# Altium PCB Power.PcbDoc
Units mil, origin at the board's own origin, x right, y up, seen from the top; angles counter-clockwise.
Board outline 1220.47 x 1201.08 mil, 2 copper layers (Top Layer, Bottom Layer); 27 components, 23 nets, 99 pads, 59 vias.
Unrouted connection lines stored in the file: 54.
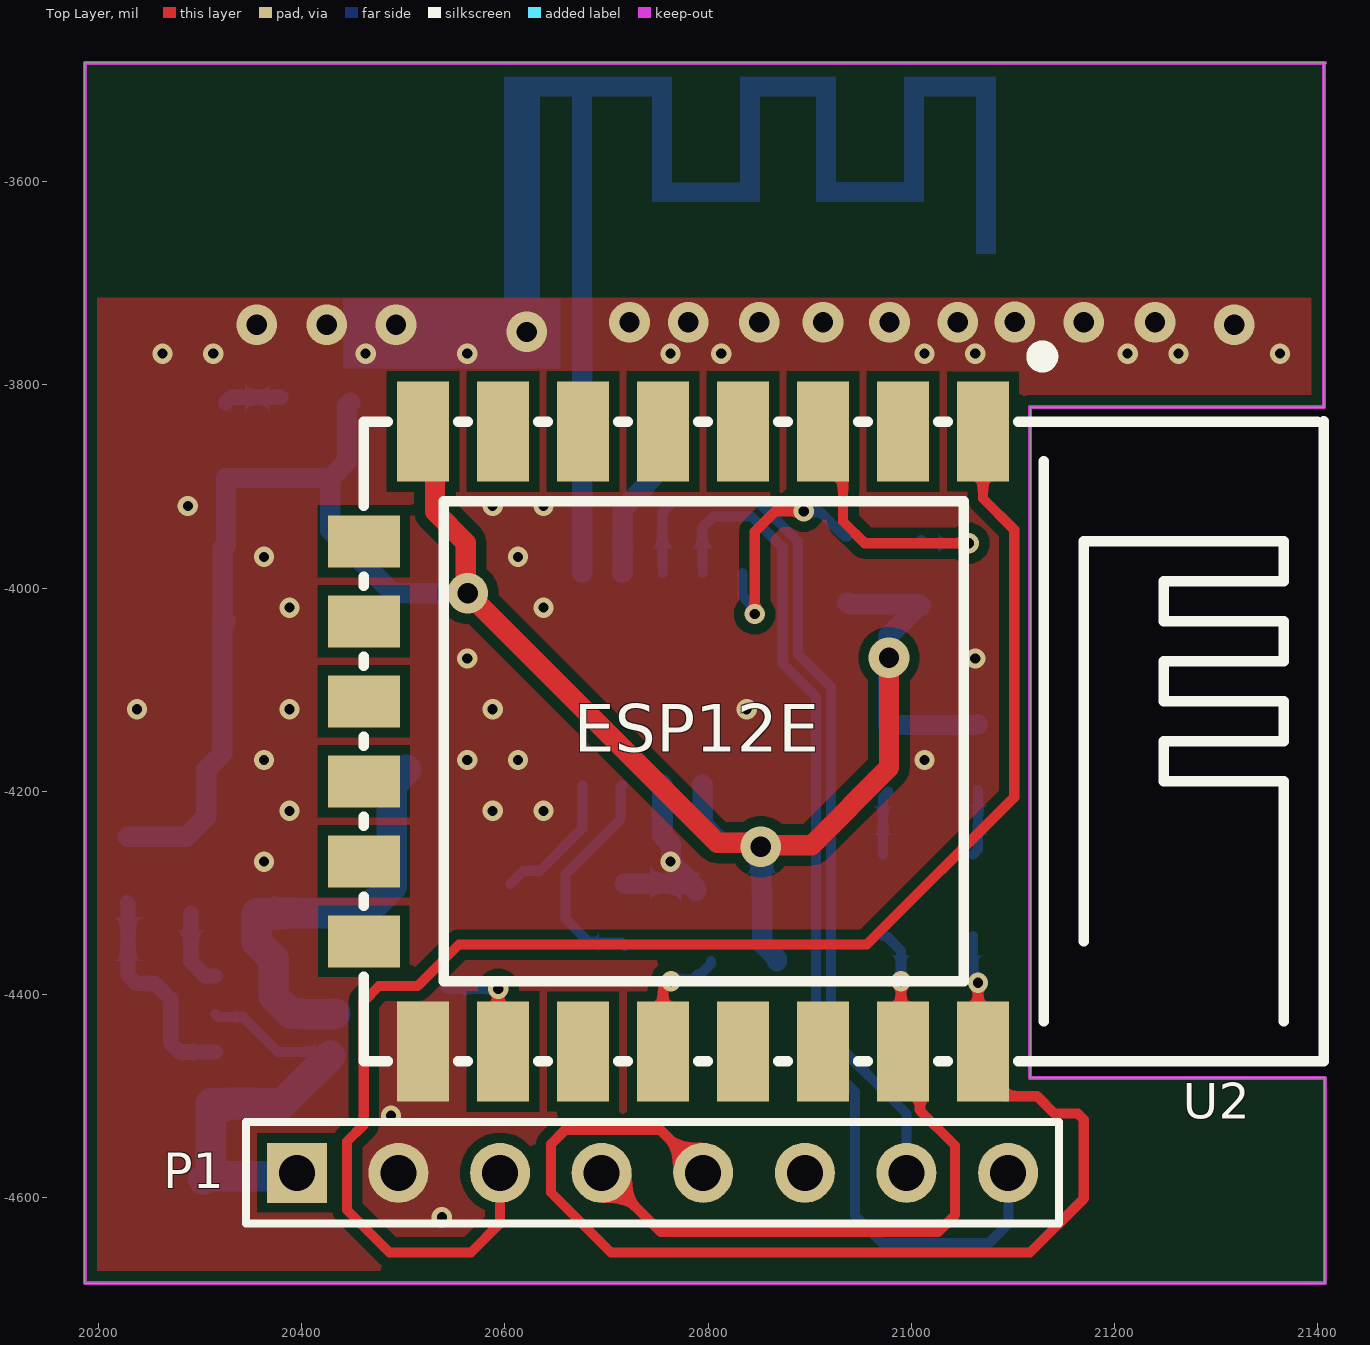
[diagram p0: Top Layer view]
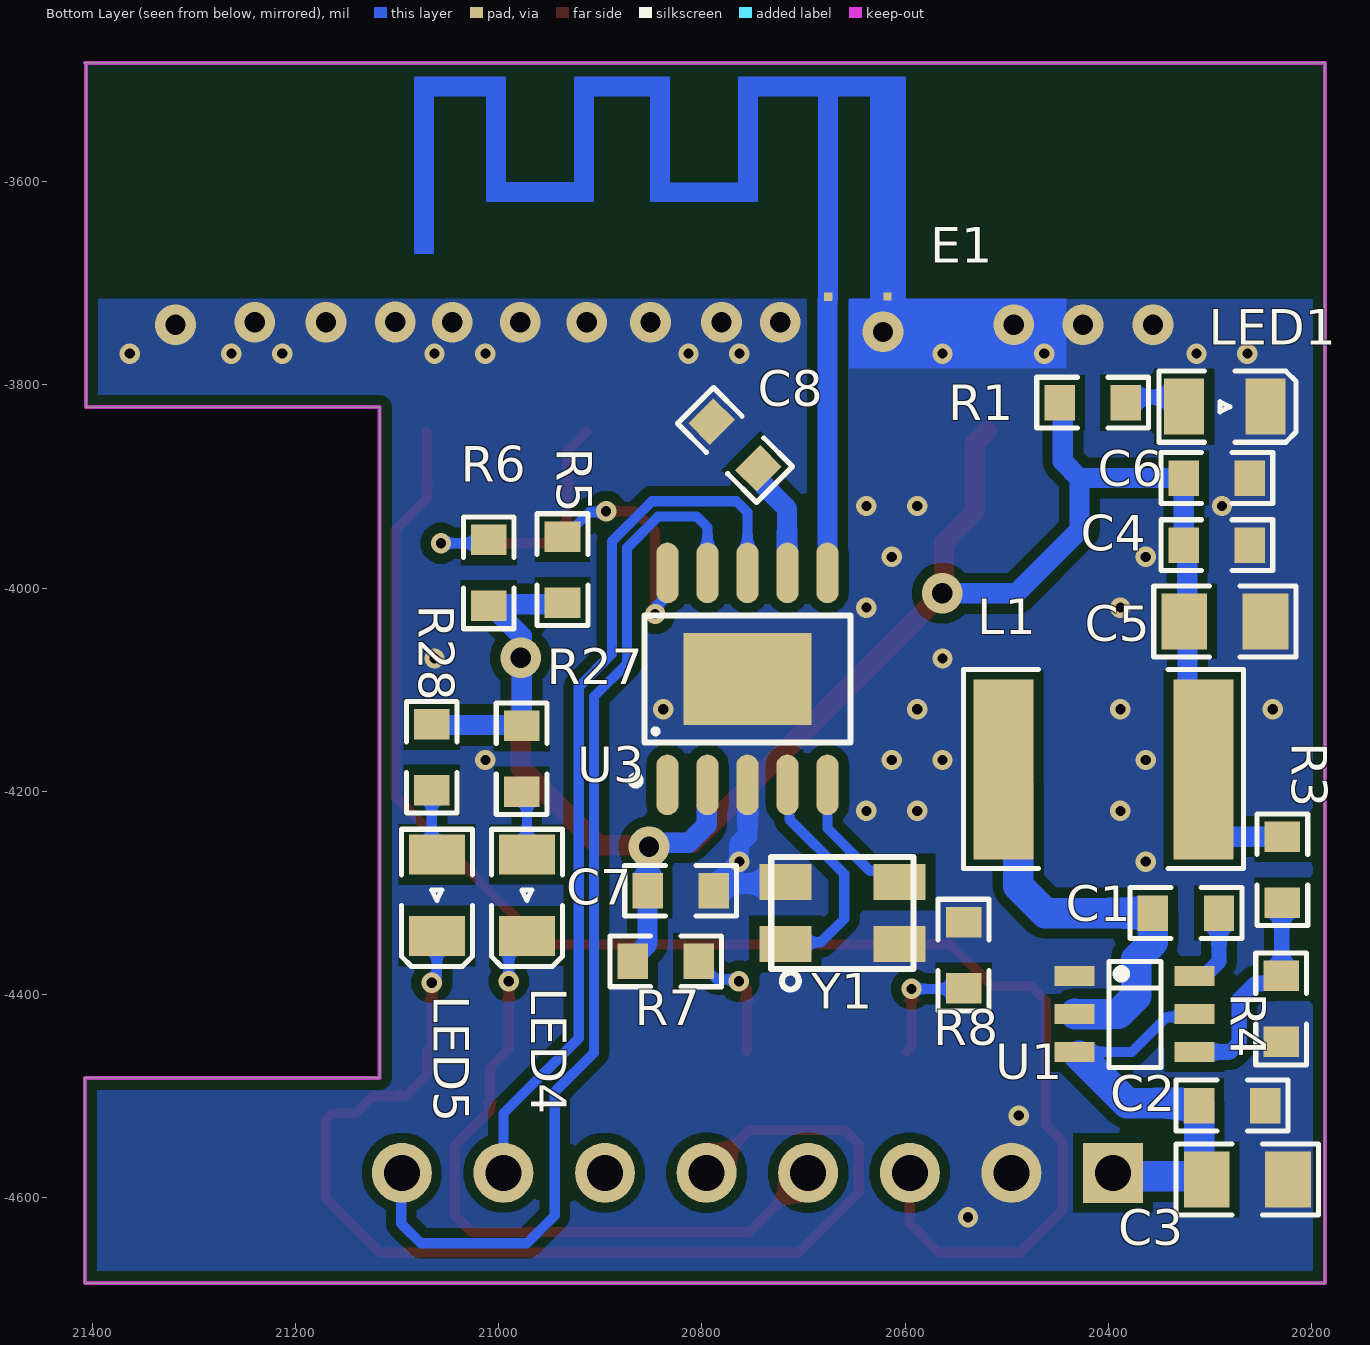
[diagram p1: Bottom Layer view, seen from below]

## Layer stack, top to bottom
Top Solder: solder mask 0.4, Solder Resist, Dk 3.5
Top Layer: signal copper 1.4
Dielectric 1: dielectric 12.6, FR-4, Dk 4.8
Bottom Layer: signal copper 1.4
Bottom Solder: solder mask 0.4, Solder Resist, Dk 3.5

## Board outline
20186.71,-4684.26 20186.71,-3483.25 20690.15,-3483.25 20690.15,-3483.18 21407.18,-3483.18 21406.09,-3484.27 21406.09,-3821.87 21117.04,-3821.87 21117.04,-4482.14 21407.18,-4482.14 21407.18,-4684.26

## Design rules (kind name [scope] priority, off if disabled: settings)
Clearance "via to pad" [Isvia vs IsPad] p1: gap=10 ignorepadtopadclearanceinfootprint=FALSE
Clearance poly [InPoly] p2: gap=10 ignorepadtopadclearanceinfootprint=FALSE
Clearance "track to track" [Istrack vs IsTrack] p3: gap=5 ignorepadtopadclearanceinfootprint=FALSE
Clearance "via to poly" [IsVia vs InPoly] p4: gap=10 ignorepadtopadclearanceinfootprint=FALSE
Clearance "via to track" [Isvia vs Istrack] p5: gap=10 ignorepadtopadclearanceinfootprint=FALSE
Clearance "via to via" [IsVia vs Isvia] p6: gap=10 ignorepadtopadclearanceinfootprint=FALSE
ComponentClearance [All] p1: gap=0 collisioncheckmode=3 verticalgap=10 showdistances=FALSE
DiffPairsRouting [All] p1: maxlimit=10 minlimit=7 mostfreqgap=7 toplayer_minwidth=5 toplayer_maxwidth=100 toplayer_prefwidth=7 bottomlayer_minwidth=5 bottomlayer_maxwidth=100 bottomlayer_prefwidth=7 maxuncoupledlength=500
HoleToHoleClearance [All] p1: gap=7 allowstackedmicrovias=TRUE
MinimumSolderMaskSliver [All] p1: minsoldermaskwidth=0
PolygonConnect AGND_1_Via [IsVia] p1: connectstyle=Direct reliefconductorwidth=10 reliefentries=4 polygonreliefangle="90 Angle" airgapwidth=10
PolygonConnect [All] p2: connectstyle=Direct reliefconductorwidth=10 reliefentries=4 polygonreliefangle="90 Angle" airgapwidth=10
PolygonConnect AC24V_Lout [All] p3: connectstyle=Relief reliefconductorwidth=10 reliefentries=4 polygonreliefangle="90 Angle" airgapwidth=10
PolygonConnect AGND_2 [InNet('AGND_2')] p4: connectstyle=Relief reliefconductorwidth=10 reliefentries=4 polygonreliefangle="90 Angle" airgapwidth=10
PolygonConnect AGND_1 [InNet('AGND_1') vs Isvia] p5: connectstyle=Direct reliefconductorwidth=10 reliefentries=4 polygonreliefangle="90 Angle" airgapwidth=10
RoutingVias RoutingVias_1 [InNet('AGND_1')] p1: holewidth=10 width=20 viastyle="Through Hole" minholewidth=10 minwidth=20 maxholewidth=100 maxwidth=100
RoutingVias [All] p2: holewidth=10 width=20 viastyle="Through Hole" minholewidth=10 minwidth=20 maxholewidth=100 maxwidth=100
SilkToSilkClearance [All] p1: silktosilkclearance=0
SilkToSolderMaskClearance [IsPad] p1: minsilkscreentomaskgap=0 clearancetoexposedcopper=TRUE
SolderMaskExpansion [All] p1: expansion=1 istentingtop=FALSE
Width [All] p1: maxlimit=300 minlimit=5 preferedwidth=7 minimp=50.000000 maximp=50.000000 favimp=50.000000
24 further rules are at their usual default settings.

## Components (designator, comment, footprint, x,y, rotation, side; value= is the part's Value field where it differs from the comment)
C1 "104/25V" 0603R 20355.97,-4319.92 r180 bottom
C2 "10uF/25V" 0603R 20245.61,-4509.45 r0 bottom
C3 "22uF/25V" 0805R 20303.11,-4582.32 r180 bottom
C4 "10uF/25V" 0603R 20260.53,-3957.83 r0 bottom
C5 "47uF/10V" 0805R 20325.18,-4032.83 r180 bottom
C6 "104/10V" 0603R 20260.53,-3891.77 r0 bottom
C7 "2.2uF" 0603R 20788.39,-4297.98 r0 bottom
C8 "2.2uF" 0603R 20790.34,-3836.29 r225 bottom
E1 "Antenna" ANT-F-1-2.4G-1.6MMFR4-WCH 20675.57,-3713.13 r180 bottom
L1 "4.7uH/3A" CD54 20503,-4178.79 r180 bottom
LED1 "LED" 0603LED 20325.18,-3821.56 r180 bottom
LED4 "LED" 0603LED 20972.19,-4262.42 r270 bottom
LED5 "LED" 0603LED 21060.78,-4262.42 r270 bottom
P1 "Header 8" HDR1X8 20395.29,-4575.6 r0 top locked
R1 "1K/5%/0603" 0603R 20447.83,-3817.55 r180 bottom
R3 "40.2K" 0603R 20228.63,-4244.79 r270 bottom
R4 "12K" 0603R 20229.82,-4381.8 r270 bottom
R5 "10K" 0603R 20937.14,-3949.4 r270 bottom
R6 "10K" 0603R 21009.7,-4017.59 r90 bottom
R7 "10K" 0603R 20802.94,-4367.42 r0 bottom
R8 "10K" 0603R 20542.37,-4393.8 r90 bottom
R27 "1K/5%/0603" 0603R 20977.35,-4135.61 r270 bottom
R28 "1K/5%/0603" 0603R 21065.78,-4134.08 r270 bottom
U1 "DIO6930" SOT-23-6DBV 20433.04,-4381.8 r270 bottom
U2 "ESP8266" ESP12E 20765.89,-4150.93 r180 top locked
U3 "CH9141K" CH9141K 20755.07,-4089.46 r180 bottom
Y1 "32MHZ/8PF" 3225 20661.7,-4319.92 r0 bottom

## Footprints (in the part's own frame and the unit in brackets; to place one, negate y for a bottom-side part, rotate by r counter-clockwise, add the part's x,y. Pads: shape width x height; smd on the part's side, far side on the other; paste and mask are expansions set on the pad)
0603LED [mm]
  rect 1x1.4 smd: 1(0,0) 2(2.032,0)
  silkscreen extent -0.64,-0.89 2.79,0.89
0603R [mil]
  rect 30x35 smd: 1(0,0) 2(65,0)
  silkscreen extent -23,-25 88,25
0805R [mil]
  rect 45x55 smd: 1(0,0) 2(80,0)
  silkscreen extent -30,-35 110,35
3225 [mm]
  rect 1.3x0.9 smd: 1(1.425,0.775) 2(-1.425,0.775) 3(-1.425,-0.775) 4(1.425,-0.775)
  silkscreen extent -1.78,-1.4 1.78,1.91, body extent -1.65,-1.3 1.55,1.2, height 0.61
ANT-F-1-2.4G-1.6MMFR4-WCH [mm]
  rect 0.2x0.2 smd mask+0: 0(1.483,0) 0(1.483,-0.004) 0(1.486,0.006) 1(-0.003,-0.01) 1(0,0) 1(0.003,0.006)
  Top Layer region: 0.24,-0.1 -0.26,-0.1 -0.26,5.231 0.24,5.231
  Top Layer region: 1.94,5 -2.26,5 -2.26,5.5 1.94,5.5
  Top Layer region: -1.76,2.361 -2.26,2.361 -2.26,5.181 -1.76,5.181
  Top Layer region: -1.85,2.36 -4.39,2.36 -4.39,2.855 -1.85,2.855
  Top Layer region: -3.96,2.36 -4.46,2.36 -4.46,5.18 -3.96,5.18
  Top Layer region: -3.96,5 -6.36,5 -6.36,5.5 -3.96,5.5
  Top Layer region: -5.86,2.361 -6.36,2.361 -6.36,5.181 -5.86,5.181
  Top Layer region: -5.875,2.361 -8.364,2.361 -8.364,2.861 -5.875,2.861
  Top Layer region: -8.06,2.361 -8.56,2.361 -8.56,5.181 -8.06,5.181
  Top Layer region: -8.06,5 -10.36,5 -10.36,5.5 -8.06,5.5
  Top Layer region: -9.86,1.06 -10.36,1.06 -10.36,5.18 -9.86,5.18
  Top Layer region: 1.94,-0.1 1.04,-0.1 1.04,5.206 1.94,5.206
CD54 [mm]
  rect 1.5x4.5 smd: 1(0,0) 2(5,0)
  silkscreen extent -1,-2.47 5.99,2.5
CH9141K [mm]
  oval 0.56x1.515 smd paste+0.051: 1(-2,-2.65) 2(-1,-2.65) 3(0,-2.65) 4(1,-2.65) 5(2,-2.65) 6(2,2.65) 7(1,2.65) 8(0,2.65) 9(-1,2.65) 10(-2,2.65)
  rect 3.2x2.3 smd paste+0.051: 11(0,0)
  silkscreen extent -2.89,-2.64 2.58,1.59
ESP12E [mm]
  rect 1.3x2.5 smd paste-100 mask+0.051: 1(-7.74,-7.75) 2(-5.74,-7.75) 3(-3.74,-7.75) 4(-1.74,-7.75) 5(0.26,-7.75) 6(2.26,-7.75) 7(4.26,-7.75) 8(6.26,-7.75) 15(6.26,7.75) 16(4.26,7.75) 17(2.26,7.75) 18(0.26,7.75) 19(-1.74,7.75) 20(-3.74,7.75) 21(-5.74,7.75) 22(-7.74,7.75)
  rect 1.8x1.3 smd paste-100 mask+0.051: 9(7.74,-5.001) 10(7.739,-3.001) 11(7.739,-1.001) 12(7.739,0.999) 13(7.739,2.999) 14(7.74,4.999)
  silkscreen extent -16.26,-9.82 7.74,8
HDR1X8 [mm] "Connector; Header; 8 Position"
  rect 1.5x1.5 hole 0.9: 1(0,0)
  round 1.5 hole 0.9: 2(2.54,0) 3(5.08,0) 4(7.62,0) 5(10.16,0) 6(12.7,0) 7(15.24,0) 8(17.78,0)
  silkscreen extent -1.27,-1.27 19.05,1.27
SOT-23-6DBV [mm]
  rect 0.5x1 smd: 1(0,0) 2(0.95,0) 3(1.9,0) 4(1.9,3) 5(0.95,3) 6(0,3)
  silkscreen extent -0.37,0.86 2.29,2.16

## Part data
C1 C6 C7 C8: library part CAP_1
C2 C4: library part CAP
C3 C5: library part "Cap Pol1", "Polarized Capacitor (Radial)", LatestRevisionDate=17-Jul-2002, LatestRevisionNote="Re-released for DXP Platform.", PackageDescription="Polarized Capacitor (Radial); 2 Leads", PackageReference=RB7.6-15, Published=8-Jun-2000, Publisher="Altium Limited"
E1: "Generic Antenna", LatestRevisionDate=17-Jul-2002, LatestRevisionNote="Re-released for DXP Platform.", PackageReference=PIN1, Published=24-Mar-1999, Publisher="Altium Limited"
L1: library part Inductor, "Inductor", Code_IEC=1005, Code_JEITA=0402, LatestRevisionDate=29-May-2009, LatestRevisionNote="IPC-7351 Footprint Added.", PackageDescription="Chip Inductor", PackageReference=0402-A, Published=8-Jun-2000, Publisher="Altium Limited"
P1: "Header, 8-Pin", LatestRevisionDate=17-Jul-2002, LatestRevisionNote="Re-released for DXP Platform.", Publisher="Altium Limited"
R1 R27 R28: library part RES
R3 R4 R5 R6 R7 R8: library part Res2, "Resistor", LatestRevisionDate=17-Jul-2002, LatestRevisionNote="Re-released for DXP Platform.", PackageDescription="Axial Device, Thru-Hole; 2 Leads; 0.4 in Pin Spacing", PackageReference=AXIAL-0.4, Published=8-Jun-2000, Publisher="Altium Limited"
U1: library part BL8032
U2: library part ESP-12E, Symbol=ESP-12E
Y1: library part 12MHz无源
U3: Symbol=CH9141K

## Via types
v1: diameter 20, hole 10, Top Layer to Bottom Layer, 42 vias
v2: diameter 40, hole 20, Top Layer to Bottom Layer, 17 vias

## Nets (pads, with @x,y where several pads share a name; then routed paths per layer and width w, separated by ;. In a path a pad name is that pad's centre, name@x,y a point inside that pad or via, vN(x,y) a via of type N, cw(c..) or ccw(c..) an arc to the next point about the centre after c; other vN are vias at no path point)
BLE_MCU_RXD: P1.8 U3.9 | length 1048.5
  Bottom Layer w10: U3.9 20794.44,-3940.3 20805.09,-3929.66 20842.82,-3929.66 20873.55,-3960.39 20873.55,-4074.24 20906.15,-4106.84 20906.15,-4457.35 20944.68,-4495.88 20944.68,-4617.68 20972,-4645 21076.38,-4645 21095.78,-4625.6 21095.78,-4576.08 P1.8
BLE_MCU_TXD: P1.7 U3.8 | length 879.6
  Bottom Layer w10: U3.8 20755.07,-3925.47 20765.89,-3914.66 20849.03,-3914.66 20888.55,-3954.18 20888.55,-4064.78 20921.15,-4097.37 20921.15,-4443.05 20995.29,-4517.2 P1.7
BLE_Reset: P1.6
GND: C2.1 C3.2 C4.1 C5.2 C6.1 C7.1 C8.1 LED1.2 P1.2 R4.2 R8.2 U1.1 U2.15 U3.3 U3.11 Y1.2 Y1.4 | length 190.6
  Bottom Layer w20: Y1.4@20717.89,-4291.01 20783.39,-4291.01 C7.1@20788.39,-4296.01 ; U3.3 20755.07,-4243.89 20763.48,-4252.29 20763.48,-4270.57 20788.39,-4295.48 C7.1@20788.39,-4296.01 ; C7.1 C7.1@20788.39,-4296.01
  other v1: 20538.03,-4619.32 20488.03,-4519.32 20363.03,-4269.32 20763.03,-4269.32 20388.03,-4219.32 20588.03,-4219.32 20638.03,-4219.32 20363.03,-4169.32 20563.03,-4169.32 20613.03,-4169.32 21013.03,-4169.32 20238.03,-4119.32 20388.03,-4119.32 20588.03,-4119.32 20838.03,-4119.32 20563.03,-4069.32 21063.03,-4069.32 20388.03,-4019.32 20638.03,-4019.32 20363.03,-3969.32 20613.03,-3969.32 20288.03,-3919.32 20588.03,-3919.32 20638.03,-3919.32 20263.03,-3769.32 20313.03,-3769.32 20463.03,-3769.32 20563.03,-3769.32 20763.03,-3769.32 20813.03,-3769.32 21013.03,-3769.32 21063.03,-3769.32 21213.03,-3769.32 21263.03,-3769.32 21363.03,-3769.32
  other v2: 20621.7,-3747.95 20355.97,-3741 20424.81,-3741 20492.86,-3741 21318,-3741 20722.72,-3738.39 20780.69,-3738.39 20850.44,-3738.39 20913.1,-3738.39 20978.63,-3738.39 21045.78,-3738.39 21101.83,-3738.18 21169.87,-3738.39 21240,-3738.39
NetC1_1: C1.1 L1.1 U1.2 | length 420.8
  Bottom Layer w30: U1.2 20432.63,-4419.62 20399.04,-4419.62 20398.63,-4419.21 20390.12,-4419.21 20372.54,-4401.63 20372.54,-4365.33 20355.97,-4348.75 C1.1 20461.92,-4319.92 20488.48,-4293.36 20488.48,-4193.32 L1.1
NetC1_2: C1.2 U1.6 | length 77.6
  Bottom Layer w15: C1.2 20290.97,-4367.68 20305.09,-4381.8 U1.6
NetC8_2: C8.2 U3.7 | length 116.2
  Bottom Layer w20: U3.7 20716.1,-3984.73 20716.1,-3921.98 20738.28,-3899.79 20738.28,-3898.96 20746.15,-3891.09 20746.15,-3884.02 C8.2
NetE1_1: E1.1 U3.6 | length 269
  Bottom Layer w20: E1.1@20676.21,-3716.19 20676.21,-3947.02 20676.33,-3947.14 U3.6
NetLED1_1: LED1.1 R1.2 | length 56.7
  Bottom Layer w15: LED1.1@20325.18,-3817.55 20330.52,-3812.21 R1.2@20379.69,-3812.21
NetLED4_1: LED4.1 R27.2 | length 64
  Bottom Layer w10: LED4.1 20972.19,-4205.77 R27.2
NetLED5_1: LED5.1 R28.2 | length 65.4
  Bottom Layer w10: LED5.1 21065.78,-4257.42 R28.2
NetR3_2: R3.2 R4.1 U1.4 | length 213.8
  Bottom Layer w15: R3.2 20229.23,-4310.39 20229.23,-4381.21 20237.32,-4389.3 20255.65,-4389.3 20271.09,-4404.75 20271.09,-4447.82 20279.88,-4456.61 U1.4
NetR5_1: R5.1 U3.10 | length 236.4
  Top Layer w10: v1(20845.94,-4025.62) 20845.94,-3944.6 20866.12,-3924.42 v1(20894.15,-3924.42)
  Bottom Layer w10: U3.10 20833.81,-4007.19 20844.03,-4017.4 20844.03,-4023.71 v1(20845.94,-4025.62) ; v1(20894.15,-3924.42) 20894.99,-3925.26 20910.49,-3925.26 20934.64,-3949.4 R5.1
NetR6_2: R6.2 U2.3 | length 277.9
  Top Layer w10: U2.3 20932.82,-3865.5 20932.82,-3934.56 20954.18,-3955.92 v1(21056.67,-3955.92)
  Bottom Layer w10: R6.2 21013.03,-3955.92 v1(21056.67,-3955.92)
NetR7_1: R7.1 U2.18 | length 121.2
  Top Layer w10: U2.18 20755.66,-4394.97 v1(20763.54,-4387.1)
  Bottom Layer w10: v1(20763.54,-4387.1) 20765.45,-4385.18 20785.19,-4385.18 20790.44,-4379.92 20792.94,-4379.92 20802.94,-4369.92 R7.1
NetR8_1: R8.1 U2.16 | length 114.9
  Top Layer w10: v1(20593.6,-4394.54) 20593.6,-4451.46 U2.16
  Bottom Layer w10: R8.1 20543.11,-4394.54 v1(20593.6,-4394.54)
VCC3.3: C4.2 C5.1 C6.2 C7.2 L1.2 R1.1 R3.1 R5.2 R6.1 R7.2 R27.1 R28.1 U2.8 U3.2 | length 2183.5
  Top Layer w20: U2.8 20531.33,-3857.71 20531.33,-3925.03 20561.56,-3955.27 20561.56,-4003.35 v2(20563.48,-4005.27) 20808.97,-4250.75 20848.2,-4250.75 v2(20852.03,-4254.58) 20853.47,-4253.13 20902.03,-4253.13 20978.11,-4177.05 v2(20978.11,-4068.59) v2@20977.35,-4067.83
  Bottom Layer w20: R3.1 20286.63,-4244.79 20306.15,-4225.26 L1.2 20322.02,-4162.93 C5.1@20322.02,-4032.83 ; C5.1 20322.35,-4030 20322.35,-3961 C4.2 C6.2 20428.27,-3891.77 ; R1.1 20444.65,-3820.73 20444.65,-3875.39 20428.27,-3891.77 ; v2(20563.48,-4005.27) 20490.35,-4005.27 20428.27,-3943.19 20428.27,-3891.77 ; U3.2 20794.84,-4194.18 20794.84,-4214.42 20795.11,-4214.7 20795.11,-4233.16 20812.7,-4250.75 20848.2,-4250.75 20852.71,-4255.26 20852.71,-4297.3 C7.2 20853.39,-4350.37 20867.94,-4364.92 R7.2 ; R5.2 20938.73,-4016 21008.1,-4016 R6.1 21007.2,-4017.59 20977.35,-4047.45 R27.1 20978.11,-4134.85 21065.01,-4134.85 R28.1
VCC12: C2.2 C3.1 P1.1 U1.3 U1.5 | length 436.2
  Bottom Layer w10: U1.5 20318.06,-4422.33 20342.55,-4422.33 20376.83,-4456.61 20424.81,-4456.61 U1.3@20428.36,-4460.15
  Bottom Layer w30: C3.1 C3.1@20306.47,-4578.96 ; P1.1 20391.93,-4578.96 C3.1@20306.47,-4578.96 ; U1.3@20428.36,-4460.15 20381.57,-4506.95 20310.61,-4506.95 20310.61,-4574.82 C3.1@20306.47,-4578.96
WIFI_MCU_RXD: LED5.2 P1.5 U2.22 | length 1128.1
  Top Layer w10: P1.5 20753.03,-4533.34 20659.45,-4533.34 20645.46,-4547.32 20645.46,-4595.02 20704.44,-4654 21116.89,-4654 21169.87,-4601.02 21169.87,-4523.06 21164.02,-4517.2 21140.9,-4517.2 21123.96,-4500.26 21091.21,-4500.26 21070.62,-4479.67 U2.22 21065.78,-4451.2 v1(21065.78,-4388.45)
  Bottom Layer w10: LED5.2 21060.78,-4383.45 v1(21065.78,-4388.45)
WIFI_MCU_TXD: LED4.2 P1.4 U2.21 | length 684.8
  Top Layer w10: P1.4 20753.7,-4634 21026.3,-4634 21043.02,-4617.28 21043.02,-4548.73 21008.69,-4514.4 21008.69,-4472.86 20989.96,-4454.12 v1(20989.96,-4387.1)
  Bottom Layer w10: LED4.2 20975.27,-4342.42 20989.96,-4357.11 v1(20989.96,-4387.1)
WIFI_Reset: P1.3 U2.1 | length 1538.1
  Top Layer w10: P1.3 20595.29,-4625.35 20566.64,-4654 20486.53,-4654 20444.65,-4612.12 20444.65,-4544.71 20461.21,-4528.15 20461.21,-4406.67 20476.21,-4391.67 20514.16,-4391.67 20554.89,-4350.93 20956.38,-4350.93 21101.38,-4205.93 21101.38,-3942.62 21070.61,-3911.85 U2.1
X32MI: U3.4 Y1.1 | length 224.1
  Bottom Layer w10: U3.4 20713.8,-4195.69 20713.8,-4227.48 20659.81,-4281.46 20659.81,-4325.76 20682.81,-4348.75 20714.61,-4348.75 Y1.1@20717.89,-4352.03
X32MO: U3.5 Y1.3 | length 136
  Bottom Layer w10: Y1.3@20605.68,-4291.01 20618.4,-4278.29 20634.6,-4278.29 20676.33,-4236.56 U3.5
pads on no net: E1.0 U2.2 U2.4 U2.5 U2.6 U2.7 U2.9 U2.10 U2.11 U2.12 U2.13 U2.14 U2.17 U2.19 U2.20 U3.1

## Polygon pours and split planes (outlines as drawn)
GND on Top Layer "NONET_L02_P-001" (solid, remove dead copper, pour order 3): 20163.35,-3705.28 20172.31,-3714.25 21542.16,-3714.25 21610.35,-3782.44 21610.35,-4758.28 21518.35,-4850.28 19832.35,-4850.28 19719.35,-4737.28 19839.35,-4617.28 19839.35,-4064.68 20164.35,-3739.68 20164.35,-3699.28
GND on Top Layer "NONET_L02_P-001" (solid, remove dead copper, pour order 1): 20136,-3720 21496.65,-3720 21609,-3832.35 21609,-4652 21488,-4773 21470,-4755 20158,-4755 20158,-4714.32 19991,-4547.32 20064,-4474.32 20064,-3752 20112.79,-3752 20140,-3724.79
GND on Bottom Layer "NONET_L02_P-001" (solid, remove dead copper, pour order 2): 20634.73,-3715.75 20186.38,-3715.75 20186.16,-3715.53 20186.16,-4679.89 21406.63,-4679.89 21406.63,-4602.85 21405.54,-4601.77 21405.54,-3715.75 21405.32,-3715.53 20634.6,-3715.53

## Keep-outs
Keep-Out Layer:
  lines w3.94: 20186.71,-4277.83 20186.71,-3769.97 ; 21406.09,-3484.27 21406.09,-3821.87 21117.04,-3821.87 21117.04,-4482.14 21407.18,-4482.14 21407.18,-4684.26 21130.51,-4684.26 20186.71,-4684.26 20186.71,-3483.25 20690.15,-3483.25 20690.15,-3483.18 21130.51,-3483.18 21407.18,-3483.18

## Other copper
Bottom Layer:
  rectangle net GND: 20440.81,-3783.96 20654.9,-3715.09

## Text inside footprints (layer, text, board x,y; h text height)
E1: Mechanical 13 "适用FR4板材，1.6mm板厚，封装未开窗，建议天线开窗。技术咨询 tech@wch.cn" at 21089.41,-3914.89 h15.75
U2: Top Overlay "ESP12E" at 20667.91,-4176.46 h80